# Allegro board CURRENT_SENSE_BOARD_03AUG15_1930.brd
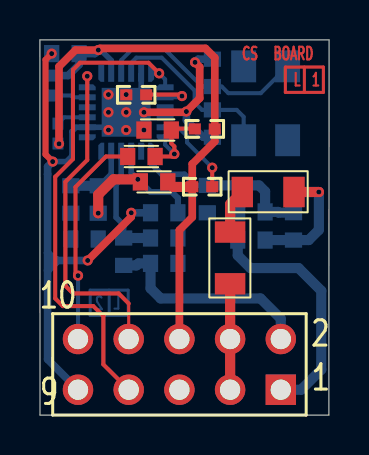
[diagram p0: board, top side]
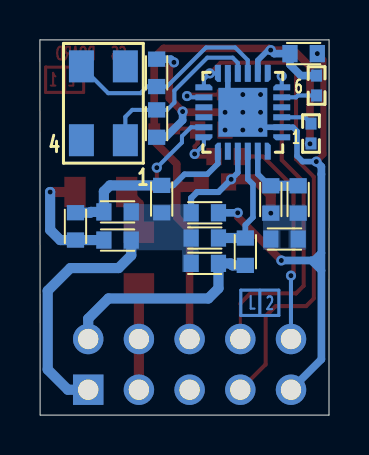
[diagram p1: board, bottom side, seen from below]

Outline 14.49 x 18.8 mm; copper layers: TOP, BOTTOM. Coordinates in mm from the lower left corner of the outline.
Outline path: 0,18.8 14.49,18.8 14.48,0 0,0 0,18.8

## Design rules (mm)
net group 50OHMS: nets N201745 N201757 N206736 N208785 N208807 N209181 N209199
net group POWER: nets GND_SIGNAL NEUTRAL_IN_AC NEUTRAL_OUT NEUTRAL_OUT_AC PHASE_TRIAC PHASE_TRIAC1_AC PHASE_TRIAC2_AC PHASE_TRIAC_AC VDD

## Placement (name value [footprint] x y rotation side)
C1  18pF  [C0603]  8.64 17.14 90 bottom
C2  18pF  [C0603]  8.64 14.61 270 bottom
C3  0.1uF  [C0603]  1.27 18.11 180 bottom
C4  1000pF  [C0603]  8.39 10.82 90 bottom
C5  1000pF  [C0603]  6.23 8.87 0 bottom
C6  NC  [C0603]  10.6 10.18 0 bottom
C7  1000pF  [C0603]  2.92 10.8 90 bottom
C12  0.1 uF  [C0603]  5.9 14.28 180 top
C13  0.1uF  [C0603]  6.23 10.13 180 bottom
J2  HEADER 10  [CONN10P_68015_210HLF_5X2_MALE]  12.07 1.27 180 top
NOREF  -  []  14.48 0 90 top
NOREF#2  -  []  0 0 0 top
R1  1K  [R0402]  4.82 16.06 0 top
R4  10K  [R0402]  0.64 16.51 90 bottom
R5  10K  [R0402]  0.89 14.11 270 bottom
R6  10K  [R0402]  8.13 11.43 180 top
R7  0  [R0603]  5.72 11.68 180 top
R8  750  [R0603]  1.55 10.8 90 bottom
R9  0  [R0603]  12.7 9.45 270 bottom
R10  10K  [R0603]  6.23 7.6 0 bottom
R11  750  [R0603]  4.19 8.18 90 bottom
R12  10K  [R0603]  2.23 8.82 180 bottom
R13  750  [R0603]  10.6 8.77 0 bottom
R14  1M  [R1206]  11.43 11.18 180 top
R18  1M  [R1206]  9.53 7.87 270 top
R22  1K  [R0402]  8.26 14.35 0 top
R23  0  [R0603]  5.08 12.95 0 top
U2  78M6610+LMU  [QFN50P400X400X100-24N]  4.32 15.17 0 bottom
Y1  20.00MHZ  [ECS-200-18-30BQ-DS]  11.31 15.62 90 bottom

## Library data of the parts
C1-C3 C13 = CAPACITOR: alternate symbols: (CAPC1005X60L,CAPC1005X60M)
C4-C7 = CAPACITOR
C12 = CAP NP
J2 = HEADER 10
R1 R4-R14 R18 R22 R23 = RESISTOR
U2 = 78M6610+LMU_0
Y1 = XTAL_1

## Footprints (pads in the part's own frame, mm; a bottom-side part is the same pattern mirrored in y, then rotated)
C0603
  rect 0.762x0.864 smd: 1(-0.686,0) 2(0.686,0)
CONN10P_68015_210HLF_5X2_MALE
  rect 1.524x1.524 hole 1.016: 1(0,0)
  round 1.524 hole 1.016: 2(0,-2.54) 3(2.54,0) 4(2.54,-2.54) 5(5.08,0) 6(5.08,-2.54) 7(7.62,0) 8(7.62,-2.54) 9(10.16,0) 10(10.16,-2.54)
ECS-200-18-30BQ-DS
  rect 1.6x1.25 smd: 1(-1.85,-1.1) 2(1.85,-1.1) 3(1.85,1.1) 4(-1.85,1.1)
QFN50P400X400X100-24N
  custom 0.85x0.3 smd: 1(-1.95,1.25) 6(-1.95,-1.25) 13(1.95,-1.25) 18(1.95,1.25)
  rect 0.85x0.3 smd: 2(-1.95,0.75) 3(-1.95,0.25) 4(-1.95,-0.25) 5(-1.95,-0.75) 14(1.95,-0.75) 15(1.95,-0.25) 16(1.95,0.25) 17(1.95,0.75)
  custom 0.3x0.85 smd: 7(-1.25,-1.95) 12(1.25,-1.95) 19(1.25,1.95) 24(-1.25,1.95)
  rect 0.3x0.85 smd: 8(-0.75,-1.95) 9(-0.25,-1.95) 10(0.25,-1.95) 11(0.75,-1.95) 20(0.75,1.95) 21(0.25,1.95) 22(-0.25,1.95) 23(-0.75,1.95)
  rect 2.45x2.45 smd: 25(0,0)
R0402
  rect 0.599x0.551 smd: 1(-0.5,0) 2(0.5,0)
R0603
  rect 0.762x0.864 smd: 1(-0.686,0) 2(0.686,0)
R1206
  rect 1.067x1.524 smd: 1(-1.295,0) 2(1.295,0)

## Nets
GND_SIGNAL: C1.2 C2.2 C3.2 C12.2 C13.2 J2.9 R1.1 U2.2(GNDA) U2.11(GNDD) U2.25(EPAD)
VDD: C3.1 J2.6 R4.2 R5.2 R6.2 R7.1 R22.2 U2.8(V3P3D)
CURRENT_SENSE_RST: J2.10 R23.1
NEUTRAL_IN: C4.1 C5.2 C6.1 C7.1 C13.1 J2.1 R7.2 R8.1 R10.2 R12.1 R12.2 R13.1 U2.21(V3P3A)
NEUTRAL_IN_AC: C7.2 R8.2 U2.23(A3)
NEUTRAL_OUT: J2.2 R10.1 R11.1
NEUTRAL_OUT_AC: C5.1 R11.2 U2.22(A2)
PHASE_TRIAC: J2.3 J2.4 R18.2
PHASE_TRIAC1_AC: R9.2 R13.2 R14.1
PHASE_TRIAC2_AC: C4.2 C6.2 R9.1 U2.19(A0)
PHASE_TRIAC_AC: R14.2 R18.1
SCL: J2.8 U2.6(SSB/DIR/SCL)
SDA: J2.7 U2.12(SDO/TX/SDAI) U2.13(SDI/RX/SDAO)
N201745: C1.1 U2.9(XIN) Y1.3
N201757: C2.1 U2.10(XOUT) Y1.1
N206736: C12.1 R22.1 R23.2 U2.18(RESET#)
N208785: R1.2 U2.14(SPCK/ADDR0)
N208807: R4.1 U2.5(MP6/ADDR1)
N209181: R5.1 U2.3(IFC0)
N209199: R6.1 U2.17(IFC1)

Pads without a net: J2 5; U2 1 4 7 15 16 20 24; Y1 2 4

## Via types
v1: diameter 0.508, hole 0.254, TOP to BOTTOM, 25 vias

## Routing (per net, layer and track width the routed paths; a pad name or vN(x,y) marks a point on that pad's centre or on a via; arc(x,y) is an arc through that point)
GND_SIGNAL: length 39.5
  TOP w0.305: v1(0.64,12.7) 0.28,13.06 0.28,17.8 v1(0.59,18.11)
  TOP w0.381: v1(4.58,10.13) 4.58,9.93 v1(2.39,7.75) ; v1(5.21,15.17) 7.3,15.17 v1(7.34,15.21) 8.01,15.88 8.01,17.44 v1(7.77,17.67)
  BOTTOM w0.279: v1(4.32,15.17) 5.07,15.92 U2.11 ; v1(3.43,14.28) 3.29,14.42 U2.2 1.81,14.42 1.6,14.21 1.6,12.98 1.32,12.7 v1(0.64,12.7)
  BOTTOM w0.381: C2.2 8.19,13.92 7.34,14.77 v1(7.34,15.21) ; v1(7.77,17.67) 7.93,17.83 C1.2 ; J2.9 0.38,2.79 0.38,7.24 ; 0.38,8.13 0.77,7.75 0.89,7.75 ; 0.38,8.13 0.38,12.06 0.39,12.45 v1(0.64,12.7) ; 0.38,8.13 0.38,7.24 ; 0.38,7.24 0.89,7.75 ; 0.89,7.75 v1(2.39,7.75) ; C13.2 v1(4.58,10.13)
  vias: v1(3.43,16.06) v1(3.43,15.17) v1(4.32,16.06) v1(4.32,14.28) v1(5.21,14.28)
VDD: length 33.1
  TOP w0.381: v1(0.96,13.59) 0.96,17.46 1.78,18.29 v1(2.93,18.29) 3.01,18.37 8.29,18.37 8.76,17.91 R22.2 8.76,13.71 7.63,12.58 R6.2 7.63,9.91 6.99,9.27 J2.6
  TOP w0.508: R7.1 6.66,11.43 R6.2
  BOTTOM w0.279: v1(2.93,18.29) 3.05,18.29 3.57,17.77 U2.8
  BOTTOM w0.381: R4.2 1.42,17.01 1.96,17.55 C3.1 2.75,18.11 v1(2.93,18.29)
CURRENT_SENSE_RST: length 10.9
  TOP w0.203: R23.1 3.31,12.95 1.78,11.43 1.78,7.11 v1(1.91,6.99)
  BOTTOM w0.203: J2.10 1.91,3.81 v1(1.91,6.99)
NEUTRAL_IN: length 20
  TOP w0.508: v1(4.91,11.81) 3.69,11.81 2.92,11.04 v1(2.92,10.12)
  BOTTOM w0.279: v1(4.91,11.81) 4.57,12.15 U2.21
  BOTTOM w0.305: C13.1 6.91,10.87 6.61,11.18 5.54,11.18 v1(4.91,11.81)
  BOTTOM w0.508: J2.1 13.09,1.27 14.1,2.28 14.1,6.23 12.96,7.37 10.55,7.37 9.91,8 R13.1
NEUTRAL_IN_AC: length 3.4
  BOTTOM w0.279: C7.2 2.98,11.49 3.57,12.08 U2.23
  BOTTOM w0.508: C7.2 R8.2
NEUTRAL_OUT: length 10.8
  BOTTOM w0.508: R11.1 4.84,7.5 4.94,7.6 R10.1 5.54,6.35 6.05,5.84 11.05,5.84 12.07,4.83 J2.2
NEUTRAL_OUT_AC: length 6
  BOTTOM w0.279: R11.2 4.19,9.53 3.81,9.91 3.81,11.56 4.07,11.82 U2.22
  BOTTOM w0.508: C5.1 R11.2
PHASE_TRIAC: length 5.3
  TOP w0.508: J2.3 J2.4 R18.2
PHASE_TRIAC1_AC: length 6
  TOP w0.508: v1(13.97,11.18) R14.1
  BOTTOM w0.508: R13.2 R9.2 13.47,8.77 13.97,9.28 v1(13.97,11.18)
PHASE_TRIAC2_AC: length 9.4
  BOTTOM w0.279: C4.2 7.8,11.51 7.24,12.06 6.1,12.06 5.57,12.59 U2.19
  BOTTOM w0.508: R9.1 11.96,10.14 11.92,10.18 C6.2 11.28,11.2 10.98,11.51 C4.2
PHASE_TRIAC_AC: length 2.3
  TOP w0.508: R14.2 9.53,10.57 R18.1
SCL: length 16.8
  TOP w0.152: J2.8 4.45,5.59
  TOP w0.203: 4.45,5.59 3.94,6.1 1.66,6.1 1.27,6.48 1.27,11.68 2.37,12.78 v1(2.37,16.98)
  BOTTOM w0.203: U2.6 v1(2.37,16.98)
SDA: length 24.7
  TOP w0.203: v1(5.97,17.12) 5.44,17.65 2.01,17.65 1.66,17.3 1.66,12.83 0.77,11.94 0.77,5.84 1.15,5.46 2.67,5.46 3.18,4.95 3.18,2.54 J2.7
  BOTTOM w0.203: U2.13 6.27,16.82 v1(5.97,17.12) U2.12
N201745: length 10.8
  BOTTOM w0.203: Y1.3 11.07,16.13 9.44,16.13 9.11,16.46 C1.1 8.12,16.46 6.17,18.41 4.7,18.41 4.07,17.78 U2.9
N201757: length 9
  BOTTOM w0.203: U2.10 4.57,17.65 4.83,17.91 6.1,17.91 7.75,16.26 7.75,15.66 8.12,15.29 C2.1 9.86,15.29 10.21,14.94 Y1.1
N206736: length 4.5
  TOP w0.203: R23.2 6.61,12.95 v1(6.73,13.08) 6.73,13.46 6.58,13.61 C12.1 6.65,14.35 R22.1
  BOTTOM w0.203: v1(6.73,13.08) 6.27,13.54 U2.18
N208785: length 2.7
  TOP w0.203: v1(7.12,15.98) 7.1,16 7.1,16 7.04,16.06 R1.2
  BOTTOM w0.203: v1(7.12,15.98) 7.1,15.98 7.03,15.92 U2.14
N208807: length 1.8
  BOTTOM w0.203: R4.1 1.56,16.01 1.65,15.92 U2.5
N209181: length 1.6
  BOTTOM w0.203: R5.1 1.21,14.92 U2.3
N209199: length 4.3
  TOP w0.203: v1(8.63,12.4) R6.1
  BOTTOM w0.203: U2.17 6.92,14.42 7.37,13.97 7.37,13.66 v1(8.63,12.4)

## Copper pours and planes (outline as drawn; the poured copper is in the pictures)
NEUTRAL_IN on BOTTOM: 6.53,10.57 6.53,7.17 7.37,7.17 7.37,8.26 10.3,8.26 10.3,10.57
NEUTRAL_IN on BOTTOM: 1.15,10.54 1.15,8.28 3.31,8.28 3.31,10.54

## Text on the board
BOTTOM: 2 | L | L02_BOTTOM
Ref Des/Assembly Bottom: ASSEMBLY BOTTOM
Package Geometry/Pastemask Bottom: PASTEMASK BOTTOM
Ref Des/Silkscreen Bottom: SILKSCREEN BOTTOM
User.Comments: SOLDERMASK BOTTOM | SOLDERMASK TOP
TOP: CS | BOARD | L | 1 | L01_TOP
Ref Des/Assembly Top: ASSEMBLY TOP
Package Geometry/Pastemask Top: PASTEMASK TOP
Ref Des/Silkscreen Top: SILKSCREEN TOP
PAGE_OUTLINE: OUTLINE
DIMENSION: FAB_DRAWING
FAB_NOTES_SHT2: STACKUP INFO | LAYER 1-TOP | LAYER 2-BOT | CORE | 62.992 MILS | (1.6 MM)
FAB_MASTER: 10. IF VIA IN PAD (VIP) SHOULD BE FILLED AND PLATTED WITH PLANNER | NOTES: | 1. ALL ARTWORK PATTERNS ARE VIEWED FROM THE TOP. | 2. PLATING FINISH METHOD SHALL BE HASL | 3. SOLDER MASK OVER BARE COPPER (SMOBC) SHALL | 4. MASK COLOUR IS GREEN AND TYPE IS LPI | 5. BOARD THICKNESS IS 1.6 MM | 6. COPPER THICKNESS | 7. PCB MATERIAL IS FR4 | 8. STACKUP SPECIFICATIONS IS AS FOLLOWS | 9. SIGNAL TRACE WIDTH 8 MILS POWER TRACEWIDTH 20 MILS (MIN 11 MILS) | BE ON BOTH SIDES. | FOR OUTER LAYERS IS 35 MICRONS
User.7: C6 | R9 | C4 | R17 | C5 | U2 | R12 | R7 | U4 | 18 | 12 | 24 | 6 | 1 | R3 | R4 | R5 | R13 | R10 | C7 | R11 | R8 | R15 | R16 | R6 | DATE: 02/03/2015 | POWER BOARD | ASSEMBLY TOP
User.8: DATE: 03/08/2015 | CURRENT SENSE BOARD
User.11: FIGURE | SIZE | 10.0 | 40.0 | DRILL CHART: TOP to BOTTOM | ALL UNITS ARE IN MILS | TOLERANCE | +3.0/-3.0 | +0.0/-0.0 | PLATED | QTY | 25 | 10
